# Altium PCB NRV_BRK_OUT.PCBDOC
Units mil, origin at the board's own origin, x right, y up, seen from the top; angles counter-clockwise.
Board outline 3603.08 x 1691 mil, 2 copper layers (Top Layer, Bottom Layer), stack 34.8 mil thick; 2 components, 114 nets, 151 pads, 0 vias.
Unrouted connection lines stored in the file: 21.
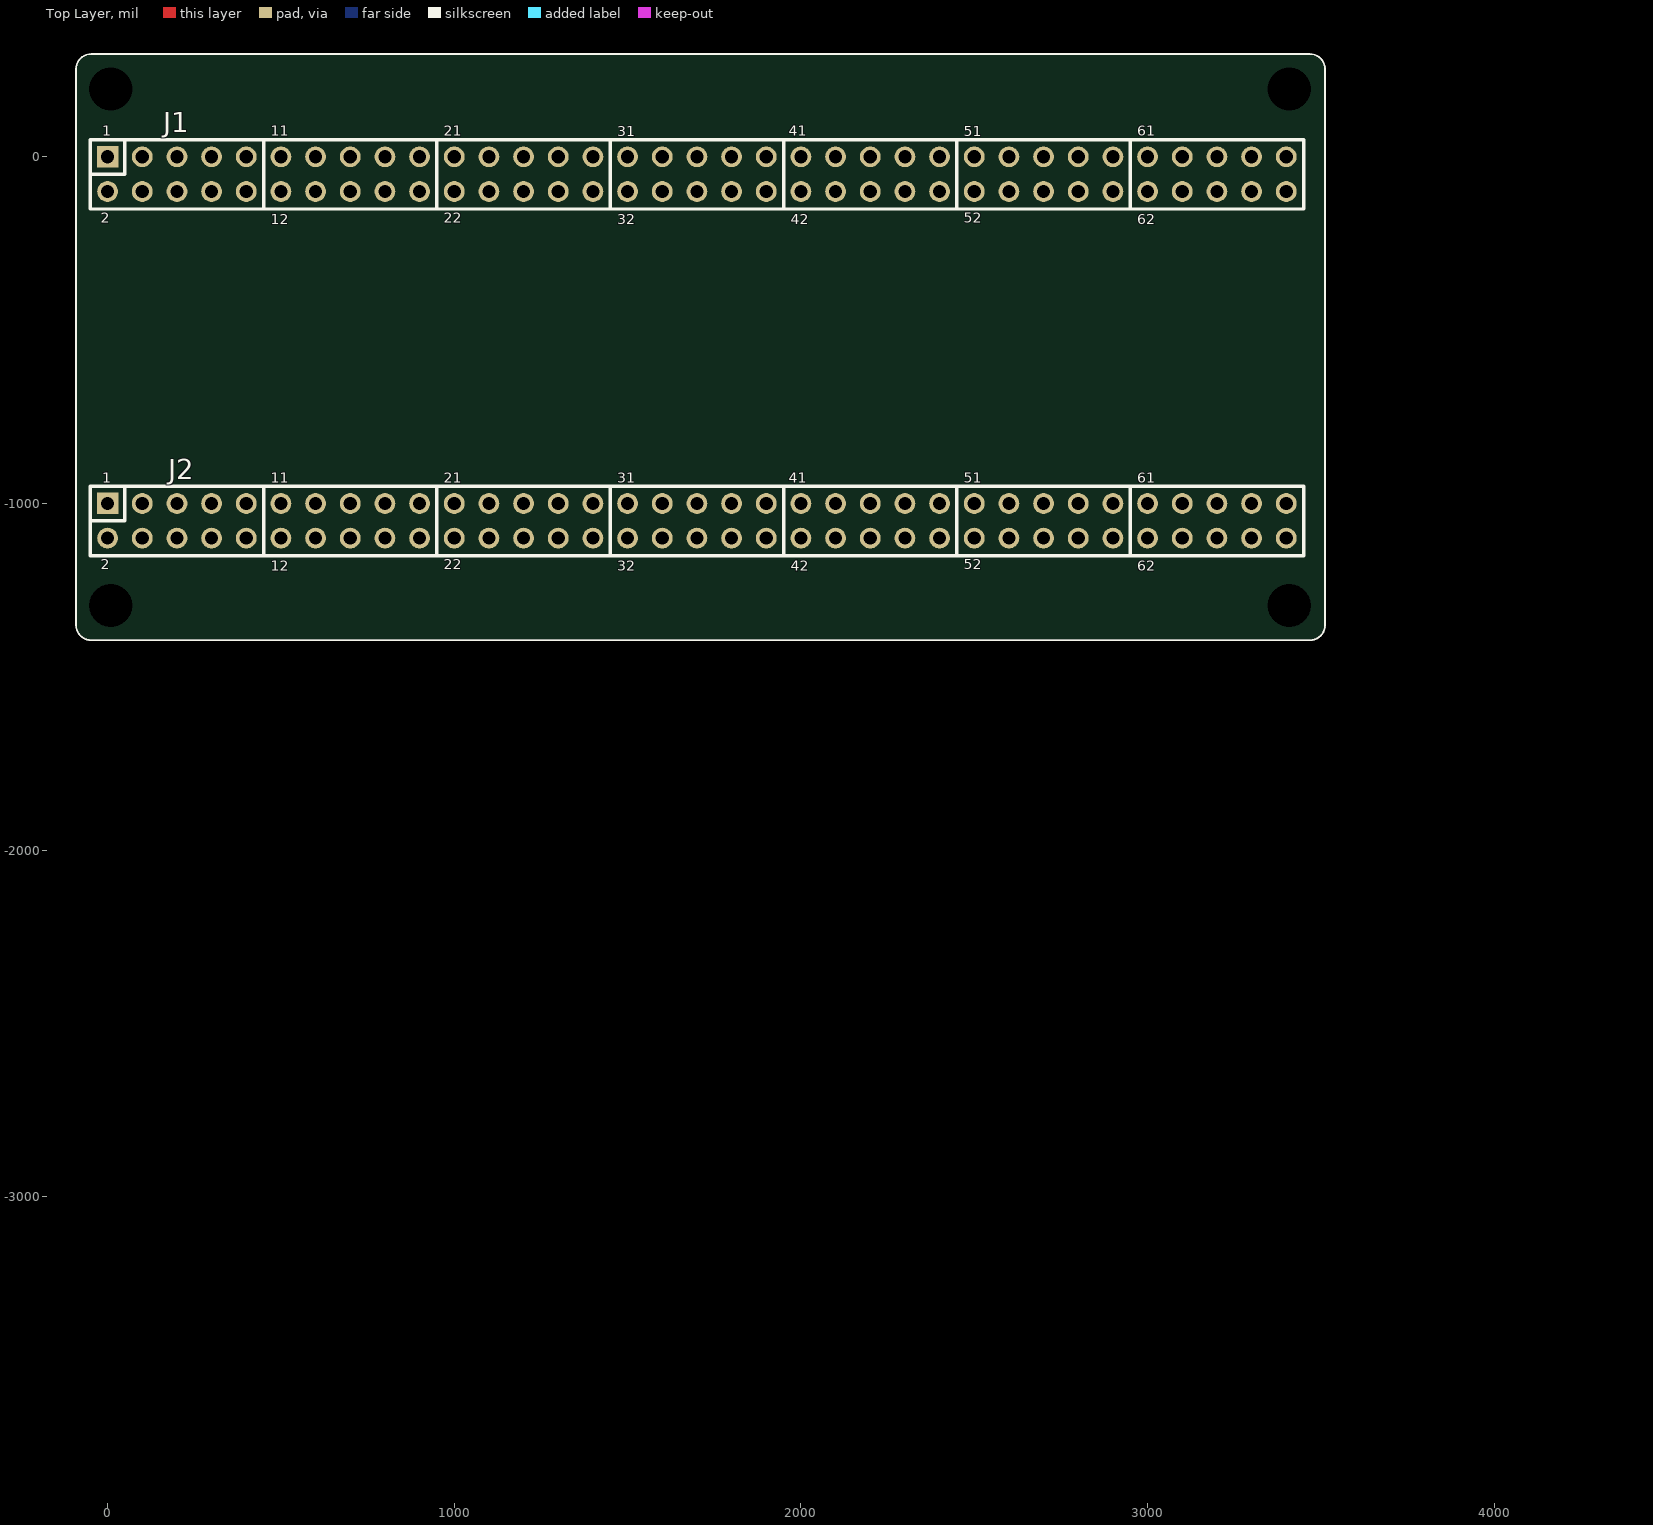
[diagram p0: Top Layer view]
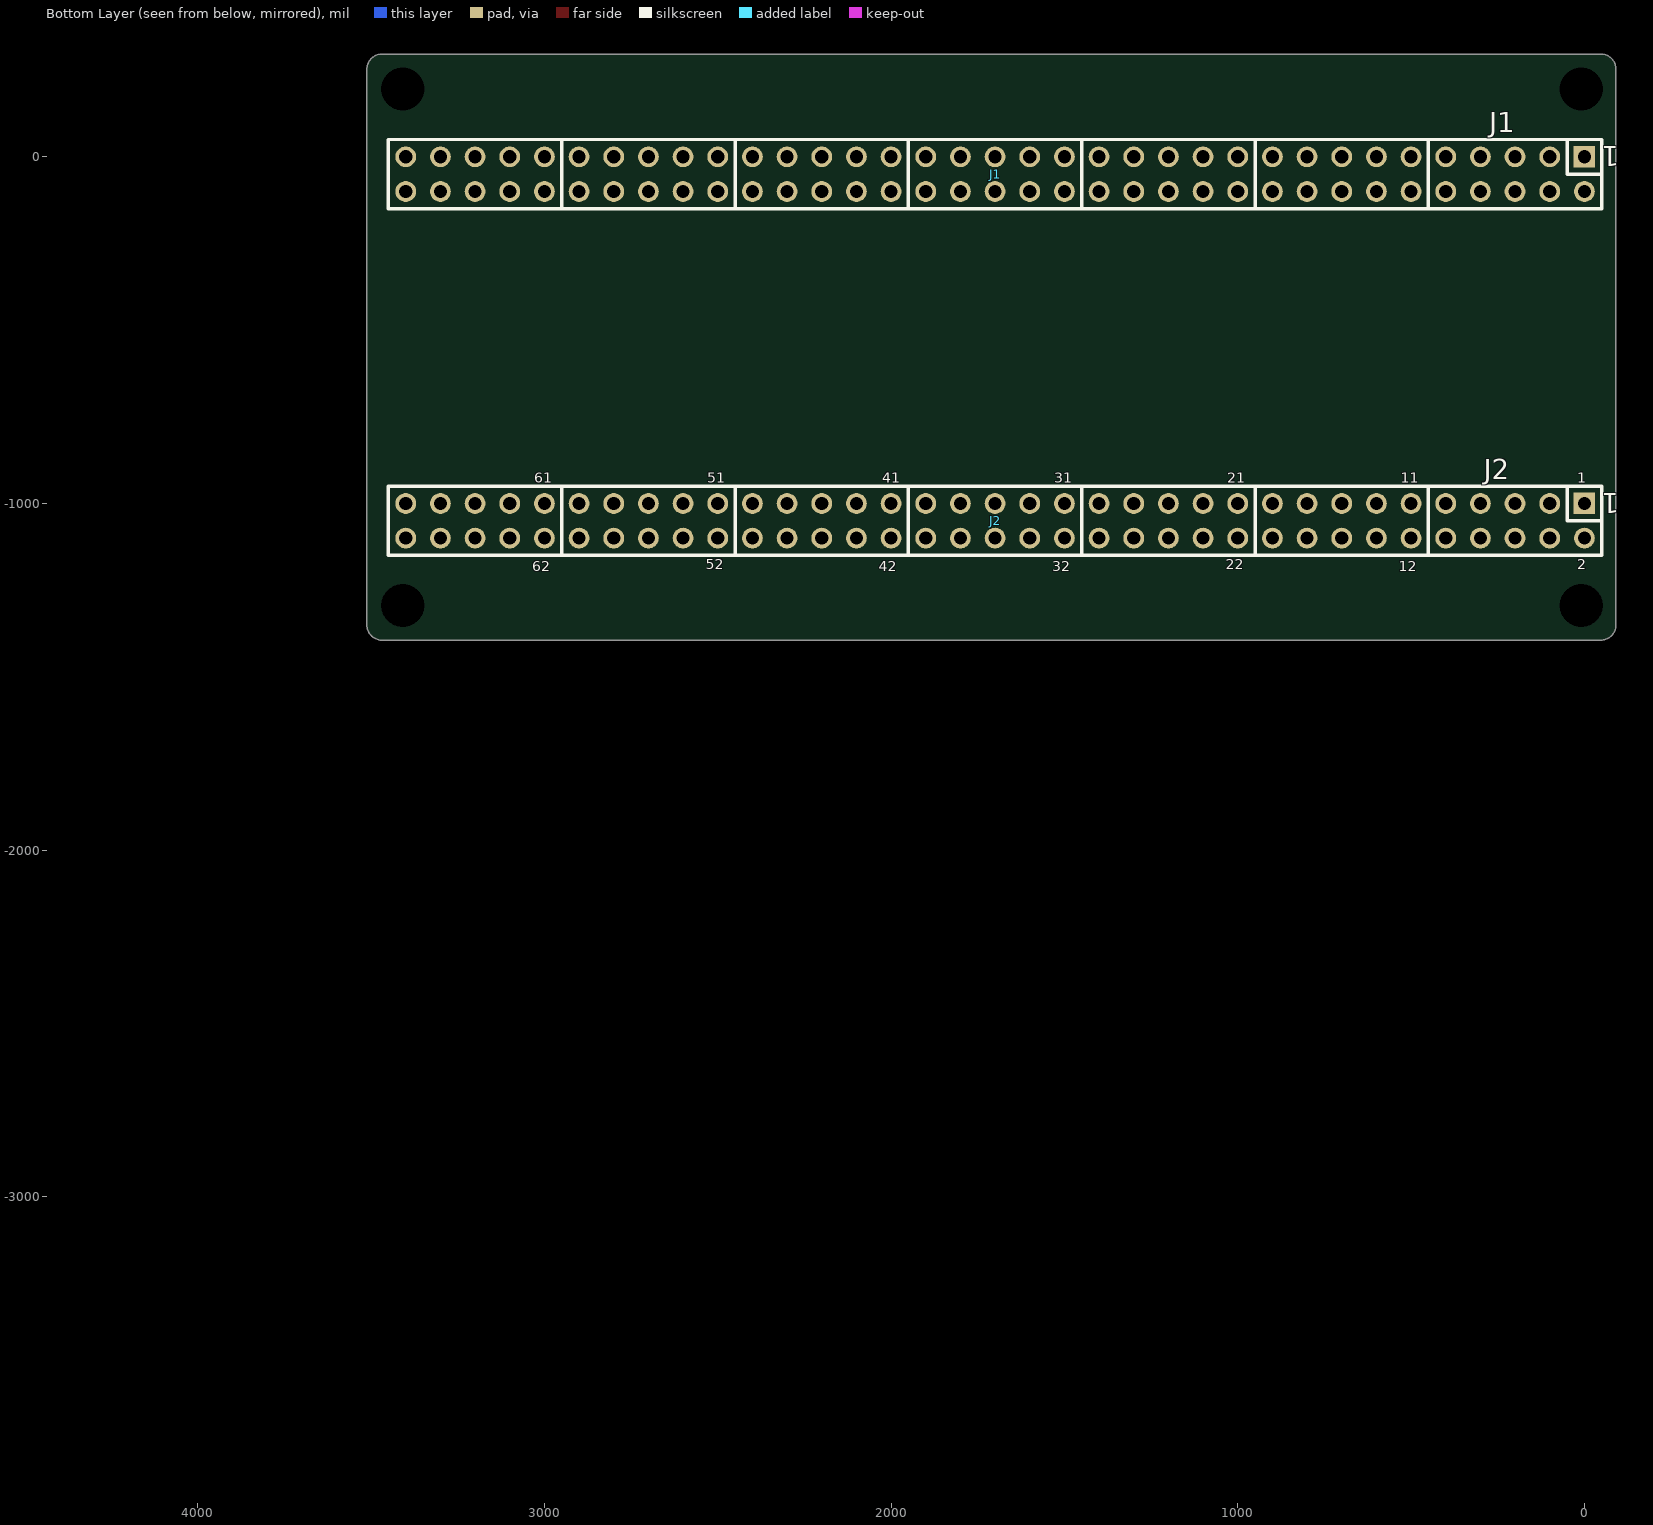
[diagram p1: Bottom Layer view, seen from below]

## Layer stack, top to bottom
Top Solder: solder mask 0.4, Solder Resist, Dk 3.5
Top Layer: signal copper 1.4
Dielectric 3: core 32, Core-042, Dk 4.6
Bottom Layer: signal copper 1.4
Bottom Solder: solder mask 0.4, Solder Resist, Dk 3.5

## Board outline
-91.08,-1350.19 ccw(c-47.08,-1350.19) -47.08,-1394.19 3468,-1394.19 3468,-1394.5 ccw(c3468,-1350.5) 3512,-1350.5 3512,252.5 ccw(c3468,252.5) 3468,296.5 -47,296.5 ccw(c-47,252.5) -91,252.5 -91.08,252.5

## Design rules (kind name [scope] priority, off if disabled: settings)
Clearance [All] p1: gap=6 ignorepadtopadclearanceinfootprint=TRUE except(8: Arc-Poly Track-Poly SMDPad-Poly THPad-Poly Via-Poly Fill-Poly Poly-Poly)
ComponentClearance [All] p1: gap=0 collisioncheckmode=3 verticalgap=0 showdistances=FALSE
DiffPairsRouting [All] p1: maxlimit=6 minlimit=6 mostfreqgap=6 toplayer_minwidth=7 toplayer_maxwidth=7 toplayer_prefwidth=7 bottomlayer_minwidth=7 bottomlayer_maxwidth=7 bottomlayer_prefwidth=7 maxuncoupledlength=500
FabricationTestPointUsage TestPointUsage [All] p1: valid=0 allowmultiple=FALSE
FabricationTestpoint Testpoint [All] p1: side=3 testpointundercomponent=TRUE minsize=40 maxsize=100 preferedsize=60 minholesize=0 maxholesize=40 preferedholesize=32 testpointgrid=1 allowsidetop=TRUE allowsidebottom=TRUE usegrid=TRUE gridtolerance=0.01
HoleSize [All] p1: absolutevalues=TRUE maxlimit=500 minlimit=6 maxpercent=80.000 minpercent=20.000
HoleToHoleClearance [All] p1: gap=0 allowstackedmicrovias=TRUE
MinimumSolderMaskSliver [All] p1: minsoldermaskwidth=0
PlaneClearance [All] p1: clearance=12
PlaneConnect [All] p1: planeconnectstyle=Direct reliefexpansion=12 reliefentries=4 reliefconductorwidth=6 reliefairgap=6
PolygonConnect [All] p1: connectstyle=Relief reliefconductorwidth=10 reliefentries=4 polygonreliefangle="90 Angle" airgapwidth=10
RoutingVias [All] p1: holewidth=12 width=26 viastyle="Through Hole" minholewidth=8 minwidth=18 maxholewidth=20 maxwidth=32
ShortCircuit ShortCircuit_1 [HasFootprint('4-40 X 250') vs HasFootprint('4-40 X 250')] p1: allowed=TRUE
ShortCircuit [All] p2: allowed=FALSE
SilkToSilkClearance [All] p1: silktosilkclearance=0
SilkToSolderMaskClearance SilkscreenOverComponentPads [IsPad] p1: minsilkscreentomaskgap=1 clearancetoexposedcopper=TRUE
SolderMaskExpansion [All] p1: expansion=2.5 istentingtop=FALSE
Width [All] p1: maxlimit=200 minlimit=5 preferedwidth=6
18 further rules are at their usual default settings.

## Classes and differential pairs
pad class "New Class": U24-25

## Components (designator, comment, footprint, x,y, rotation, side; value= is the part's Value field where it differs from the comment)
J1 "HDR_2x35" "HEADER 2X35 .100\"" 0,0 r0 bottom
J2 "HDR_2x35" "HEADER 2X35 .100\"" 0,-1000 r0 bottom

## Footprints (in the part's own frame and the unit in brackets; to place one, negate y for a bottom-side part, rotate by r counter-clockwise, add the part's x,y. Pads: shape width x height; smd on the part's side, far side on the other; paste and mask are expansions set on the pad)
"HEADER 2X35 .100\"" [mil]
  rect 62x62 hole 38: 1(0,0)
  round 60 hole 38: 2(0,100) 3(100,0) 4(100,100) 5(200,0) 6(200,100) 7(300,0) 8(300,100) 9(400,0) 10(400,100) 11(500,0) 12(500,100) 13(600,0) 14(600,100) 15(700,0) 16(700,100) 17(800,0) 18(800,100) 19(900,0) 20(900,100) 21(1000,0) 22(1000,100) 23(1100,0) 24(1100,100) 25(1200,0) 26(1200,100) 27(1300,0) 28(1300,100) 29(1400,0) 30(1400,100) 31(1500,0) 32(1500,100) 33(1600,0) 34(1600,100) 35(1700,0) 36(1700,100) 37(1800,0) 38(1800,100) 39(1900,0) 40(1900,100) 41(2000,0) 42(2000,100) 43(2100,0) 44(2100,100) 45(2200,0) 46(2200,100) 47(2300,0) 48(2300,100) 49(2400,0) 50(2400,100) 51(2500,0) 52(2500,100) 53(2600,0) 54(2600,100) 55(2700,0) 56(2700,100) 57(2800,0) 58(2800,100) 59(2900,0) 60(2900,100) 61(3000,0) 62(3000,100) 63(3100,0) 64(3100,100) 65(3200,0) 66(3200,100) 67(3300,0) 68(3300,100) 69(3400,0) 70(3400,100)
  silkscreen extent -50,-50 3450,150

## Part data
J1 J2: "2x35 Header .100\"", Supplier Part Number 1=1849-PR20204VBDN-ND, Pricing="1=0.16000, 10=0.15400, 100=0.09510, 500=0.07872, 1000=0.06888, 5000=0.05904, 10000=0.05740 (USD)", RoHS=No, Stock=3387, Supplier 1=Digi-Key

## Free pads (board coordinates)
  round 0 hole 125 unplated: 1(9,-1294.5) 1(9,195.5) 1(3409,-1294.5) 1(3409,195.5)
  round 10 on Mech16: 1(346.14,-2502.09) 1(346.14,-1502.09) 1(2096.14,-1002.09) 1(2596.14,-1002.09) 1(3044.98,-3790.04) 1(4346.14,-2502.09) 1(4346.14,-1502.09)

## Nets (pads, with @x,y where several pads share a name; then routed paths per layer and width w, separated by ;. In a path a pad name is that pad's centre, name@x,y a point inside that pad or via, vN(x,y) a via of type N, cw(c..) or ccw(c..) an arc to the next point about the centre after c; other vN are vias at no path point)
ADC0_A0: J1.41
ADC0_B0: J1.39
ADC1_A0: J1.37
ADC1_B0: J1.35
DAC2_OUT: J1.33
GND: J1.2 J1.12 J1.16 J1.20 J1.24 J1.42 J1.44 J2.41 J2.70
OPAMP0_INN: J1.29
OPAMP1_INN: J1.27
OPAMP2_INN: J1.25
P0_4: J2.24
P0_5: J2.22
P0_6/P2_2/CAMERA_CLKIN: J2.64
P0_7/FXIO_LCD_DC: J1.50
P0_8/FXIO_LCD_RD: J1.53
P0_9/FXIO_LCD_WR: J1.52
P0_10/EZH_CAMERA_VSYNC: J2.65
P0_11/EZH_CAMERA_HSYNC: J2.66
P0_12/FXIO_LCD_CS: J1.51
P0_13/FXIO_LCD_TE: J1.54
P0_14/EZH_CAMERA_PCLK: J2.63
P0_15/ME_ADC0_B15: J2.27
P0_16/FC0_I2C_SDA: J2.6 J2.68
P0_17/FC0_I2C_SCL: J2.8 J2.67
P0_18/ME_FC0_TXD: J1.34
P0_19/ME_FC0_RXD: J1.32
P0_20/PMOD_INT: J2.12
P0_22: J2.38
P0_24/ME_FC1_SPI_SDO: J2.37
P0_25/ME_FC1_SPI_SCK: J2.33
P0_26/ME_FC1_SPI_SDI: J2.35
P0_27/ME_FC1_SPI_PCS0: J2.31
P0_28: J2.23
P0_30: J2.34
P0_31: J2.26
P1_0/PMOD_FC3_SPI_SDO: J2.9
P1_1/PMOD_FC3_SPI_SCK: J2.5
P1_2/PMOD_FC3_SPI_SDI: J2.7
P1_3/PMOD_FC3_SPI_PCS0: J2.11
P1_4/EZH_LCD_D0_CAMERA_D0/SAI0_TX_D1: J1.6 J2.56
P1_5/EZH_LCD_D1_CAMERA_D1: J2.55
P1_6/EZH_LCD_D2_CAMERA_D2: J2.58
P1_7/EZH_LCD_D3_CAMERA_D3: J2.57
P1_8/EZH_LCD_D4_CAMERA_D4: J2.60
P1_9/EZH_LCD_D5_CAMERA_D5: J2.59
P1_10/EZH_LCD_D6_CAMERA_D6: J2.62
P1_11/FXIO_LCD_GPIO/EZH_LCD_D7_CAMERA_D7/I3C1_PUR: J1.48 J2.61
P1_12/EZH_LCD_D8: J2.48
P1_13/EZH_LCD_D9: J2.47
P1_14/EZH_LCD_D10: J2.50
P1_15/EZH_LCD_D11: J2.49
P1_16/EZH_LCD_D12/I3C1_SDA: J2.52
P1_17/EZH_LCD_D13/I3C1_SCL: J2.51
P1_18/EZH_LCD_D14_CAMERA_PDOWN: J2.54
P1_19/EZH_LCD_D15_CAMERA_RST: J2.53
P1_20/EZH_DEBUG: J2.42
P1_21/SAI1_MCLK: J1.23
P1_22/EZH_LCD_DC: J2.44
P1_23/EZH_LCD_RD: J2.43
P2_0/EZH_LCD_WR: J2.45
P2_4: J2.25
P2_5: J2.17
P2_6: J1.18
P2_7: J1.26
P2_8/FXIO_D16: J1.55
P2_9/FXIO_D17: J1.56
P2_10/FXIO_D18: J1.57
P2_11/FXIO_D19: J1.58
P3_1/PMOD_RESET: J2.10
P3_2/LED_GREEN: J2.14
P3_3/LED_BLUE: J2.16
P3_4/LED_RED: J2.18
P3_5/ME_PWM: J1.28
P3_10/SAI0_TX_D0: J1.5
P3_16/SAI1_TX_BCLK: J1.1
P3_17/SAI1_TX_FS: J1.10
P3_18/SAI1_RX_BCLK: J1.19
P3_19/SAI1_RX_FS: J1.15
P3_20/SAI1_TX_D0: J1.7
P3_21/SAI1_RX_D0: J1.13
P3_22/EZH_LCD_RST: J2.40
P3_23/SAI1_TX_D1: J1.8
P4_0/FC2_I2C_SDA: J1.9 J1.38 J1.46
P4_1/FC2_I2C_SCL: J1.11 J1.36 J1.45
P4_2: J2.30
P4_3: J2.32
P4_4/EZH_LCD_CS: J2.46
P4_6/FXIO_LCD_INT: J1.47
P4_7/FXIO_LCD_RST: J1.49
P4_12/FXIO_D20: J1.59
P4_13/FXIO_D21: J1.60
P4_14/FXIO_D22: J1.61
P4_15/FXIO_D23: J1.62
P4_16/FXIO_D24: J1.63
P4_17/FXIO_D25: J1.64
P4_18/FXIO_D26: J1.65
P4_19/FXIO_D27: J1.66
P4_20/FXIO_D28: J1.67
P4_21/FXIO_D29: J1.68
P4_22/FXIO_D30: J1.69
P4_23/FXIO_D31: J1.70
P5_2/GPIO: J1.3
P5_3/GPIO: J1.4
P5_4/INT: J1.21
P5_5: J2.21
P5_6: J2.19
P5_7/ME_INT: J1.30
P5_8: J2.20
P5_9/RESET: J1.17
RESET_B: J2.29
USB0_DM: J2.13
USB0_DP: J2.15
USB_VBUS: J1.14 J1.40
VDD: J1.43 J2.1 J2.2 J2.39 J2.69
VREF_OUT: J1.31
pads on no net: J1.22 J2.3 J2.4 J2.28 J2.36

## Silkscreen, mask and mechanical layers (free items; w line width, h text height)
Top Overlay:
  lines w5: 3467.69,-1394.5 -47.08,-1394.5 cw(c-47.08,-1350.5) -91.08,-1350.5 -91.08,252.5 -91,252.5 cw(c-47,252.5) -47,296.5 3468,296.5 cw(c3468,252.5) 3512,252.5 3512,-1350.5 cw(c3468,-1350.5) 3468,-1394.5
  lines w10: -49.7,-1050.43 50,-1050.43 50,-950.6 ; -49.7,-50.43 50,-50.43 50,49.4 ; 50,49.5 50.04,49.5 ; 450,-1149.4 450,-950 ; 450,-150 450,49.4 ; 950,-1149.4 950,-950 ; 950,-150 950,49.4 ; 1450,-1149.4 1450,-950 ; 1450,-149.4 1450,50 ; 1950,-1149.4 1950,-950 ; 1950,-149.4 1950,50 ; 2450,-1149.4 2450,-950 ; 2450,-149.4 2450,50 ; 2950,-1149.4 2950,-950 ; 2950,-149.4 2950,50 ; -50,-1150.5 -50,-950.5 3450,-950.5 3450,-1150.5 -50,-1150.5 ; -50,-150.5 3450,-150.5 3450,49.5 -50,49.5 -50,-150.5
  text "1" at -15,50 h50
  text "J1" at 160,50 h100
  text "11" at 470,50 h50
  text "21" at 970,50 h50
  text "31" at 1470,49.4 h50
  text "41" at 1965,50 h50
  text "51" at 2470,49.5 h50
  text "61" at 2970,50 h50
  text "2" at -20,-200 h50
  text "22" at 970,-200 h50
  text "52" at 2470,-200 h50
  text "12" at 470,-205 h50
  text "32" at 1470,-205 h50
  text "42" at 1970,-205 h50
  text "62" at 2970,-205 h50
  text "1" at -15,-949.79 h50
  text "11" at 470,-949.79 h50
  text "21" at 970,-949.79 h50
  text "41" at 1965,-949.79 h50
  text "61" at 2970,-949.79 h50
  text "J2" at 175,-950.5 h100
  text "31" at 1470,-950.39 h50
  text "51" at 2470,-950.29 h50
  text "2" at -20,-1199.79 h50
  text "22" at 970,-1199.79 h50
  text "52" at 2470,-1199.79 h50
  text "12" at 470,-1204.79 h50
  text "32" at 1470,-1204.79 h50
  text "42" at 1970,-1204.79 h50
  text "62" at 2970,-1204.79 h50
Bottom Overlay:
  lines w10: 450,-1150 450,-950 ; 450,-150 450,50 ; 950,-1150 950,-950 ; 950,-150 950,50 ; 1450,-1150 1450,-950 ; 1450,-150 1450,50 ; 1950,-1150 1950,-950 ; 1950,-150 1950,50 ; 2450,-150 2450,50 ; 2950,-150 2950,50 ; 2450,-1150 2450,-950 2450,-1150 ; 2950,-1150 2950,-950 2950,-1150
  text "J1" at 275,50 h100
  text "1" at 20,-950 h50
  text "J2" at 290,-950 h100
  text "11" at 530,-950 h50
  text "21" at 1030,-950 h50
  text "31" at 1530,-950 h50
  text "41" at 2025,-950 h50
  text "51" at 2530,-950 h50
  text "61" at 3030,-950 h50
  text "2" at 20,-1200 h50
  text "22" at 1035,-1200 h50
  text "52" at 2535,-1200 h50
  text "12" at 535,-1205 h50
  text "32" at 1535,-1205 h50
  text "42" at 2035,-1205 h50
  text "62" at 3035,-1205 h50
Mechanical 13:
  circle w5: c3409,195.5 r62.4
  circle w5: c3409,-1294.5 r62.5
  circle w5: c9,-1294.5 r62.4
  circle w5: c9,195.5 r62.4
  circle w5: c0,-100 r21.54
  circle w5: c0,0 r21.54
  circle w5: c0,-1100 r21.54
  circle w5: c0,-1000.5 r21.54
  text "1" at -5,-16.5 h50
  text "2" at -7.03,-116.5 h50
  text "1" at -9,-1015.5 h50
  text "2" at -11.03,-1115.5 h50

## Text inside footprints (layer, text, board x,y; h text height)
J1: Bottom Overlay "1" at -100,50 h100 r180
J2: Bottom Overlay "1" at -100,-950 h100 r180